# Altium PCB ClientMainBoard.PcbDoc
Units mm, origin at the board's own origin, x right, y up, seen from the top; angles counter-clockwise.
Board outline 75.44 x 83.44 mm, 2 copper layers (Top Layer, Bottom Layer); 7 components, 15 nets, 56 pads, 0 vias.
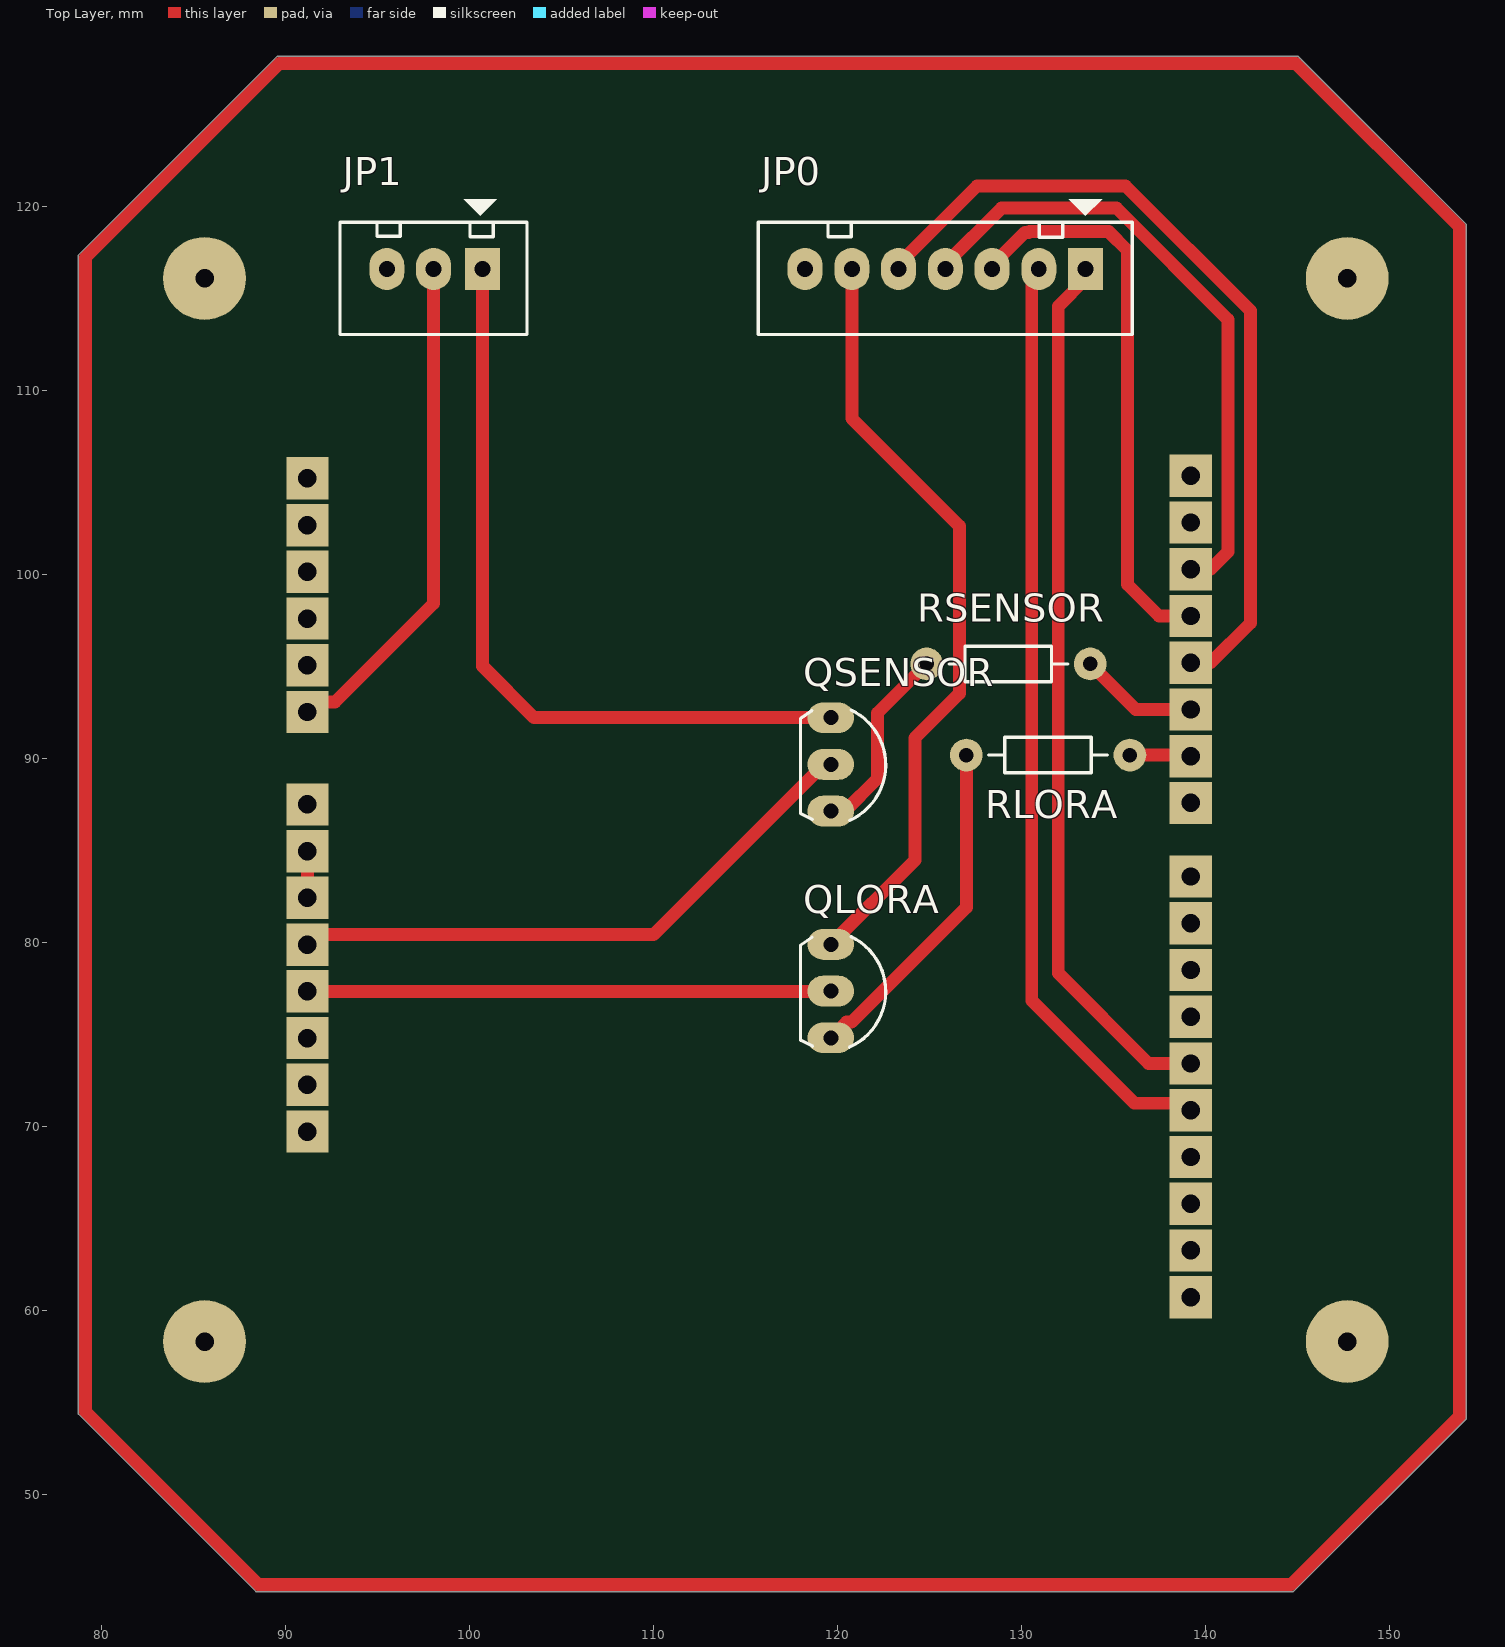
[diagram p0: Top Layer view]
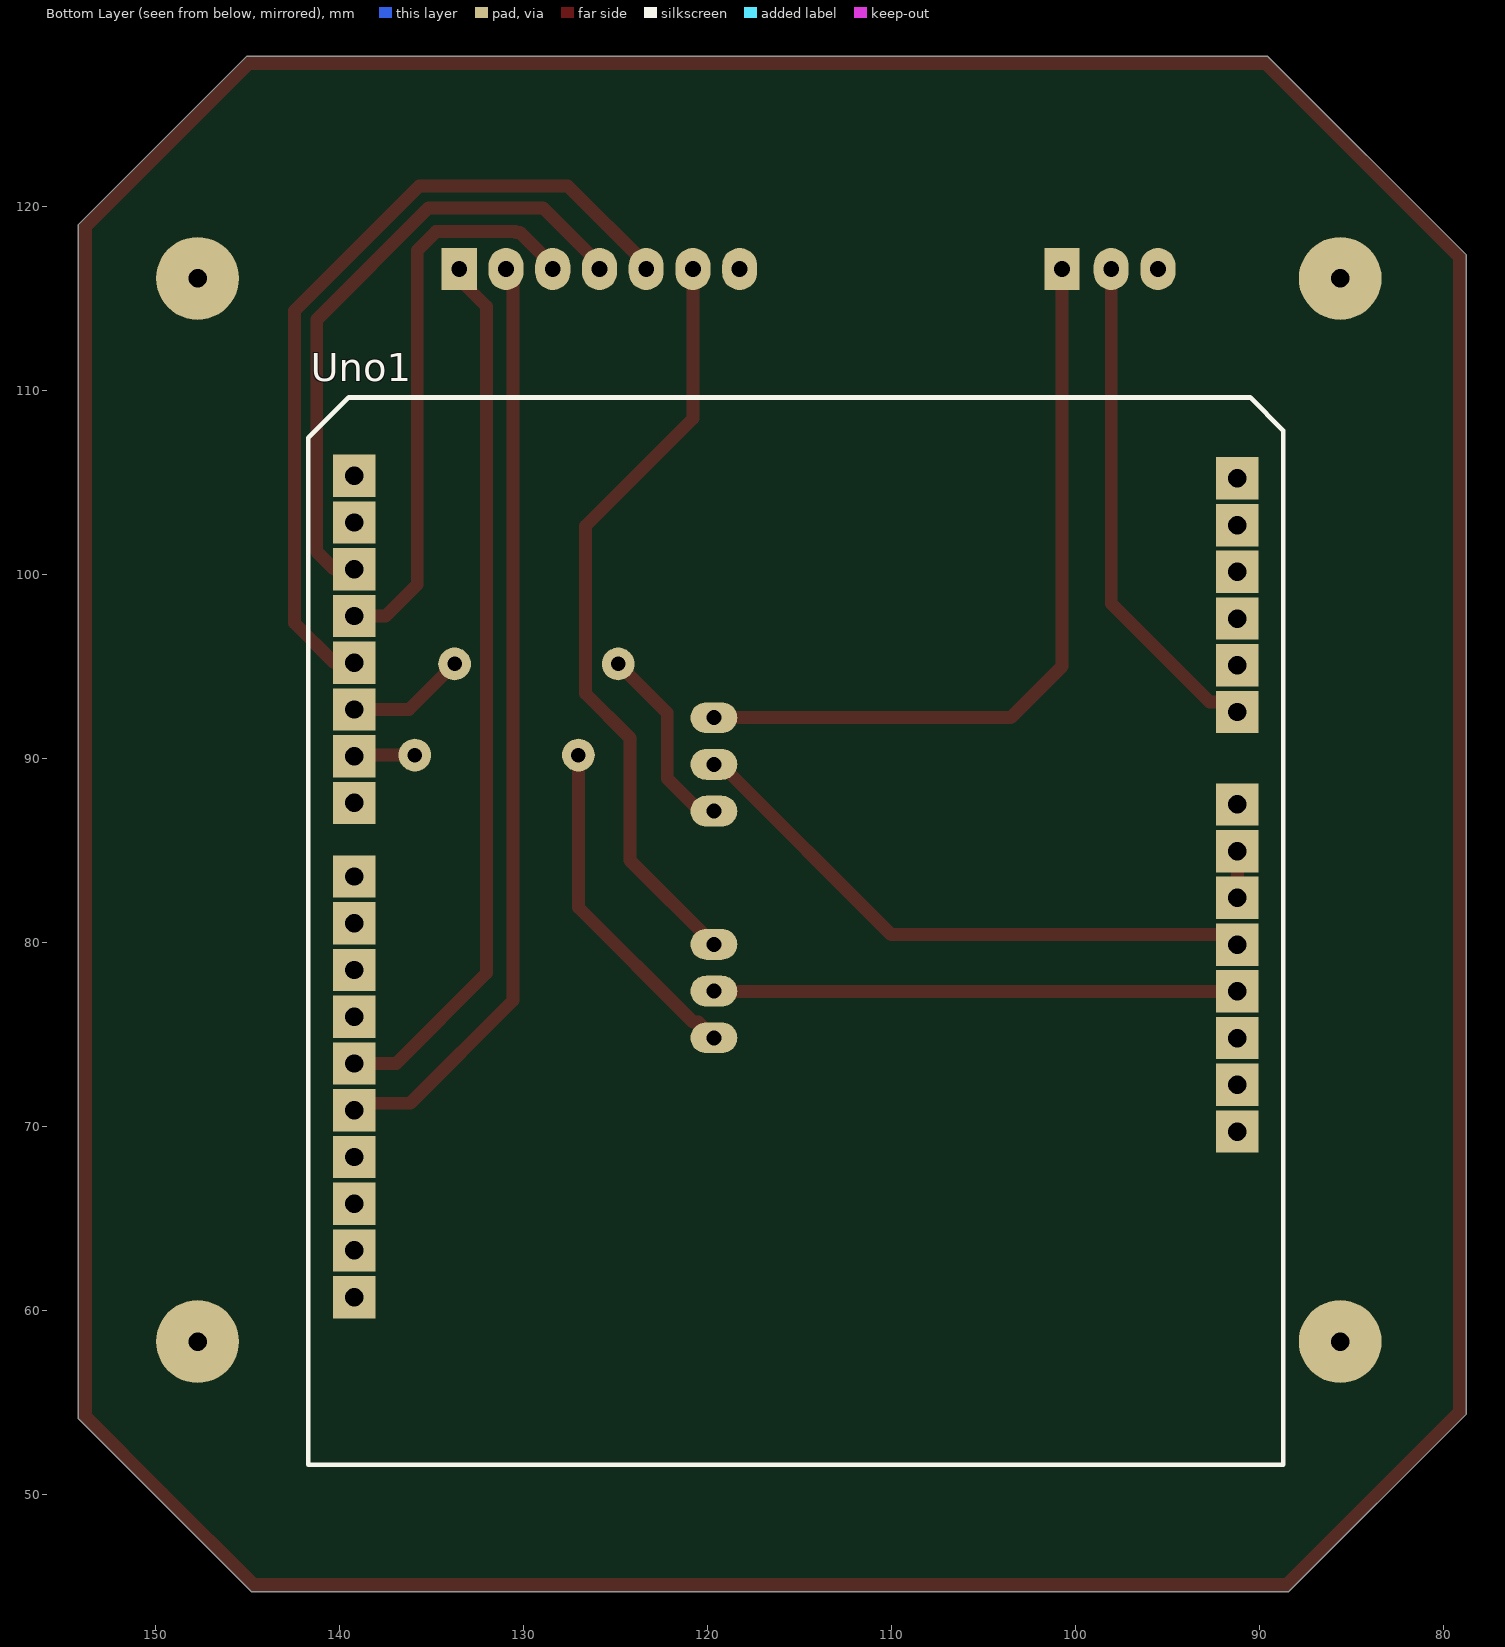
[diagram p1: Bottom Layer view, seen from below]
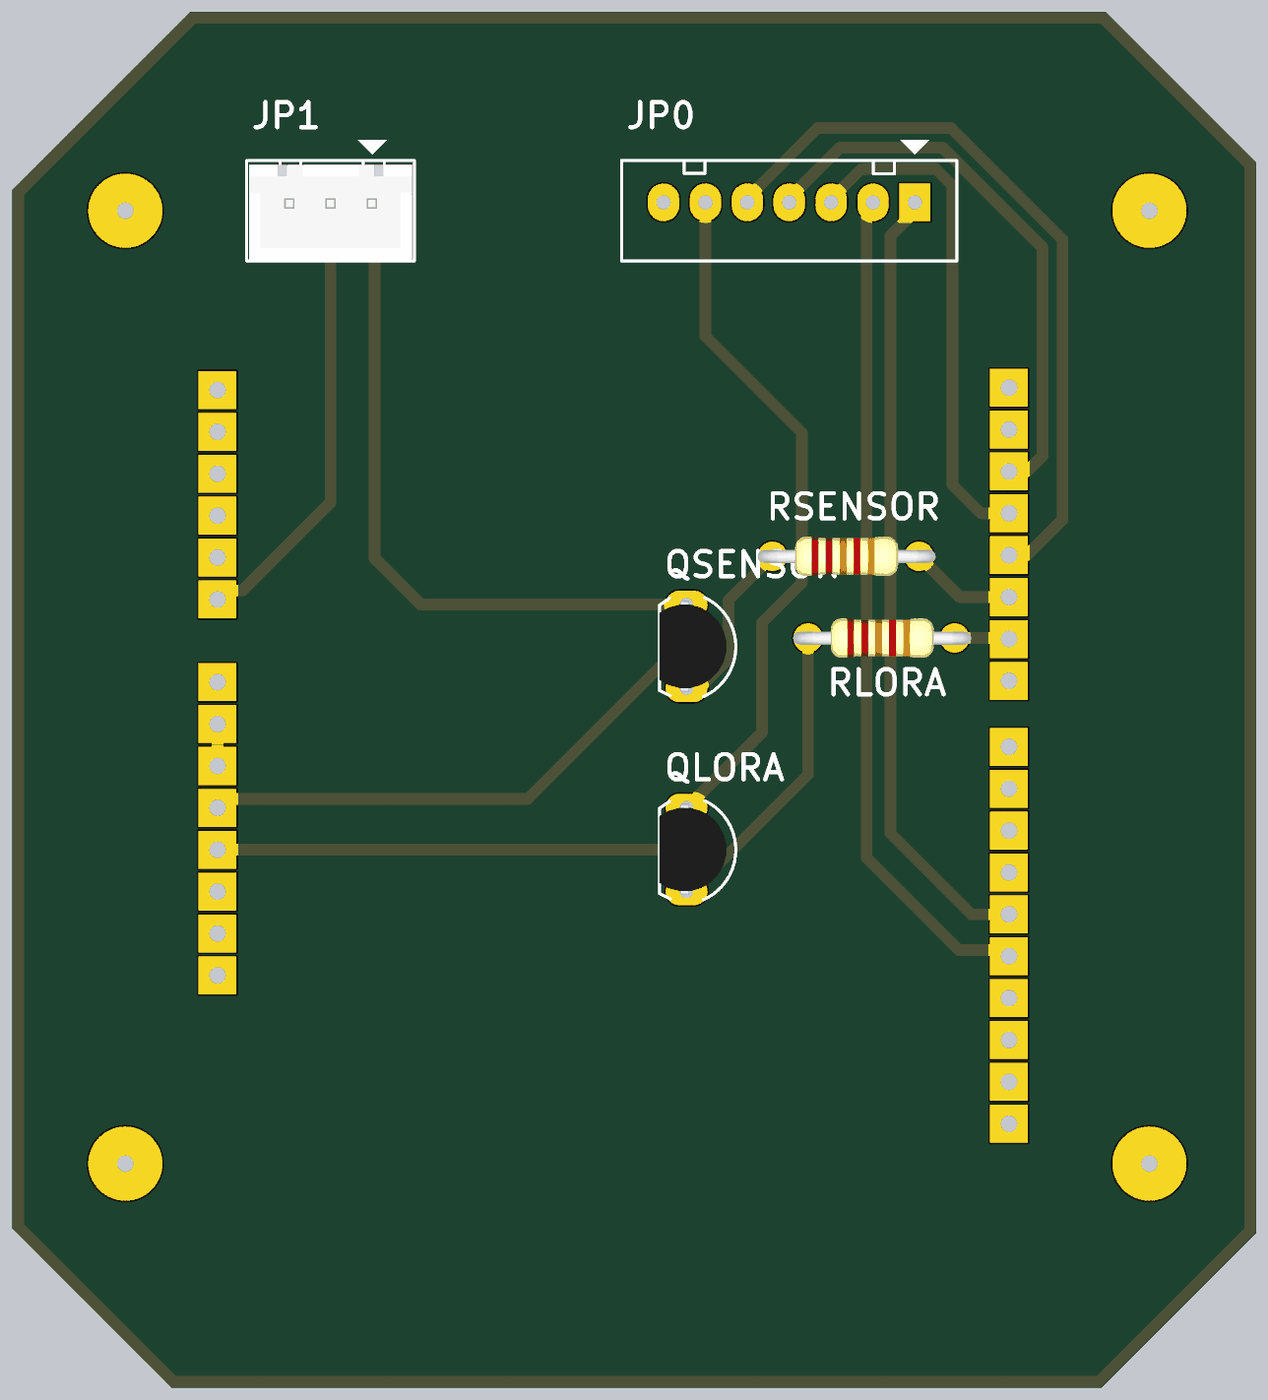
[diagram p2: 3D render of the assembled board from above, using the file's embedded part models]

## Layer stack, top to bottom
Top Solder: solder mask 0.0102, Solder Resist, Dk 3.5
Top Layer: signal copper 0.0356
Dielectric 1: dielectric 0.32, FR-4, Dk 4.8
Bottom Layer: signal copper 0.0356
Bottom Solder: solder mask 0.0102, Solder Resist, Dk 3.5

## Board outline
78.74,117.348 89.535,128.143 145.034,128.143 154.178,118.999 154.178,54.102 144.78,44.704 88.392,44.704 78.74,54.356

## Design rules (kind name [scope] priority, off if disabled: settings)
Clearance [All] p1: gap=0.5
DiffPairsRouting [All] p1: maxlimit=0.7 minlimit=0.5 mostfreqgap=0.6 toplayer_minwidth=0.5 toplayer_maxwidth=0.7 toplayer_prefwidth=0.6 bottomlayer_minwidth=0.5 bottomlayer_maxwidth=0.7 bottomlayer_prefwidth=0.6 maxuncoupledlength=12.7
PolygonConnect [All] p1: connectstyle=Relief reliefconductorwidth=0.254 reliefentries=4 polygonreliefangle="90 Angle" airgapwidth=0.254
RoutingCorners [All] p1: cornerstyle=45-Degree minsetback=1 maxsetback=1
RoutingLayers [All] p1: top layer_v5=TRUE bottom layer_v5=FALSE
RoutingVias [All] p1: holewidth=0.711 width=1.27 viastyle="Through Hole" minholewidth=0.711 minwidth=1.27 maxholewidth=0.711 maxwidth=1.27
SolderMaskExpansion [All] p1: expansion=0.102
Width [All] p1: maxlimit=0.7 minlimit=0.5 preferedwidth=0.7
27 further rules are at their usual default settings.

## Classes and differential pairs
component class Sheet1: JP0 JP1 QLORA QSENSOR RLORA RSENSOR

## Components (designator, comment, footprint, x,y, rotation, side; value= is the part's Value field where it differs from the comment)
JP0 "LORA" CON7 133.477,116.586 r180 top
JP1 "SENSOR" CON3 100.584,116.586 r180 top
QLORA "C1815" QTO-92 119.634,77.343 r270 top
QSENSOR "C1815" QTO-92 119.634,89.662 r270 top
RLORA "1k" R1/4W 135.89,90.17 r180 top
RSENSOR "1k" R1/4W 133.731,95.123 r180 top
Uno1 "Arduino Uno" "Arduino Uno Adapter" 115.189,79.248 r90 bottom

## Footprints (in the part's own frame and the unit in brackets; to place one, negate y for a bottom-side part, rotate by r counter-clockwise, add the part's x,y. Pads: shape width x height; smd on the part's side, far side on the other; paste and mask are expansions set on the pad)
"Arduino Uno Adapter" [mm]
  rect 2.3x2.3 hole 1: 0(26.1,24) 1(23.56,24) 2(21.02,24) 3(18.48,24) 3V3(-1.92,-24) 4(15.94,24) 5(13.4,24) 5V(0.62,-24) 6(10.86,24) 7(8.32,24) 8(4.32,24) 9(1.78,24) 10(-0.76,24) 11(-3.3,24) 12(-5.84,24) 13(-8.38,24) A0(13.26,-24) A1(15.8,-24) A2(18.34,-24) A3(20.88,-24) A4(23.42,-24) A5(25.96,-24) AREF(-13.46,24) GND1(3.16,-24) GND2(5.7,-24) GND3(-10.92,24) IOREF(-7,-24) NC(-9.54,-24) RESET(-4.46,-24) SCL(-18.54,24) SDA(-16,24) Vin(8.24,-24)
  silkscreen extent -27.64,-26.5 30.36,26.5
CON3 [mil] "CON 3"
  rect 75x90 hole 34: 1(-5,0)
  oval 75x90 hole 34: 2(100,0) 3(200,0)
  silkscreen extent -100,-150 300,140, body extent -95,-90 295,136, height 276
CON7 [mil] "CON7"
  rect 75x90 hole 34: 1(0,0)
  oval 75x90 hole 34: 2(100,0) 3(200,0) 4(300,0) 5(400,0) 6(500,0) 7(600,0)
  silkscreen extent -100,-150 700,140
QTO-92 [mil] "TO-92"
  oval 66x100 hole 32: 1(-100,0) 2(0,0) 3(100,0)
  silkscreen extent -117,-65 120,118, body extent -109,-66 109,96, height 245
R1/4W [mil] "R 1/4W, 2 Pin, 350mil"
  round 70 hole 31: 1(0,0) 2(350,0)
  silkscreen extent 48,-38 302,38, body extent -40,-47 386,47, height 111

## Part data
JP0: library part Con7, "Connector 7"
JP1: library part Con3, "Connector 3"
QLORA QSENSOR: "NPN 600mW, ECB"
RLORA RSENSOR: library part R1/4W, "Resistor 1/4W"

## Free pads (board coordinates)
  round 4.5 hole 1: 18(85.598,58.293) 18(85.598,116.078) 18(147.701,58.293) 18(147.701,116.078)

## Nets (pads, with @x,y where several pads share a name; then routed paths per layer and width w, separated by ;. In a path a pad name is that pad's centre, name@x,y a point inside that pad or via, vN(x,y) a via of type N, cw(c..) or ccw(c..) an arc to the next point about the centre after c; other vN are vias at no path point)
GND: JP0.7 JP1.3 Uno1.GND1 Uno1.GND2 Uno1.GND3 | length 4
  Top Layer w0.7: Uno1.GND1 Uno1.GND2 Uno1.GND2@91.729,85.488 ; JP1.3 JP1.3@95.504,116.786 ; Uno1.GND3 Uno1.GND3@139.189,68.868
NetJP0_1: JP0.1 Uno1.12 | length 48.1
  Top Layer w0.7: JP0.1 133.477,116.039 131.992,114.554 131.992,78.32 136.904,73.408 Uno1.12
NetJP0_2: JP0.2 Uno1.13 | length 51
  Top Layer w0.7: JP0.2 130.937,116.386 130.556,116.005 130.556,76.835 136.144,71.247 138.81,71.247 Uno1.13
NetJP0_3: JP0.3 Uno1.3 | length 31
  Top Layer w0.7: JP0.3 128.397,116.786 130.19,118.579 130.39,118.579 130.429,118.618 134.743,118.618 135.763,117.598 135.763,99.441 137.476,97.728 Uno1.3
NetJP0_4: JP0.4 Uno1.2 | length 34.4
  Top Layer w0.7: JP0.4 125.857,116.84 128.918,119.901 135.157,119.901 141.224,113.834 141.224,101.219 140.273,100.268 Uno1.2
NetJP0_5: JP0.5 Uno1.4 | length 45.1
  Top Layer w0.7: JP0.5 123.317,116.84 127.578,121.101 135.654,121.101 142.437,114.318 142.437,97.352 140.273,95.188 Uno1.4
NetJP0_6: JP0.6 QLORA.1 | length 42
  Top Layer w0.7: QLORA.1 124.206,84.455 124.206,91.105 126.619,93.518 126.619,102.616 120.777,108.458 JP0.6
NetJP1_1: JP1.1 QSENSOR.1 | length 41.7
  Top Layer w0.7: JP1.1 100.711,94.996 103.505,92.202 QSENSOR.1
NetJP1_2: JP1.2 Uno1.A0 | length 28.1
  Top Layer w0.7: Uno1.A0 91.729,93.048 92.691,93.048 98.044,98.401 JP1.2 JP1.2@98.044,117.221
NetQLORA_2: QLORA.2 Uno1.3V3 | length 28.5
  Top Layer w0.7: Uno1.3V3 119.619,77.328 QLORA.2
NetQLORA_3: QLORA.3 RLORA.2 | length 18.6
  Top Layer w0.7: QLORA.3 120.486,75.655 120.765,75.655 127,81.89 RLORA.2
NetQSENSOR_2: QSENSOR.2 Uno1.5V | length 32.5
  Top Layer w0.7: Uno1.5V 91.729,80.408 109.999,80.408 119.253,89.662 QSENSOR.2
NetQSENSOR_3: QSENSOR.3 RSENSOR.2 | length 10.6
  Top Layer w0.7: QSENSOR.3 120.396,87.122 122.174,88.9 122.174,92.456 RSENSOR.2
NetRLORA_1: RLORA.1 Uno1.6 | length 3.3
  Top Layer w0.7: RLORA.1 139.127,90.17 Uno1.6
NetRSENSOR_1: RSENSOR.1 Uno1.5 | length 6.5
  Top Layer w0.7: RSENSOR.1 136.206,92.648 Uno1.5
pads on no net: Uno1.0 Uno1.1 Uno1.7 Uno1.8 Uno1.9 Uno1.10 Uno1.11 Uno1.A1 Uno1.A2 Uno1.A3 Uno1.A4 Uno1.A5 Uno1.AREF Uno1.IOREF Uno1.NC Uno1.RESET Uno1.SCL Uno1.SDA Uno1.Vin
copper on no net: | length 292.5
  Top Layer w0.7: 79.121,54.483 79.121,64.897 79.121,117.221 89.662,127.762 144.907,127.762 153.797,118.872 153.797,58.674 153.797,54.229 149.606,50.038 144.653,45.085 88.519,45.085 79.121,54.483